# Altium PCB CanTho.PcbDoc
Units mil, origin at the board's own origin, x right, y up, seen from the top; angles counter-clockwise.
Board outline 2000 x 1439 mil, 2 copper layers (Top Layer, Bottom Layer); 60 components, 46 nets, 263 pads, 69 vias.
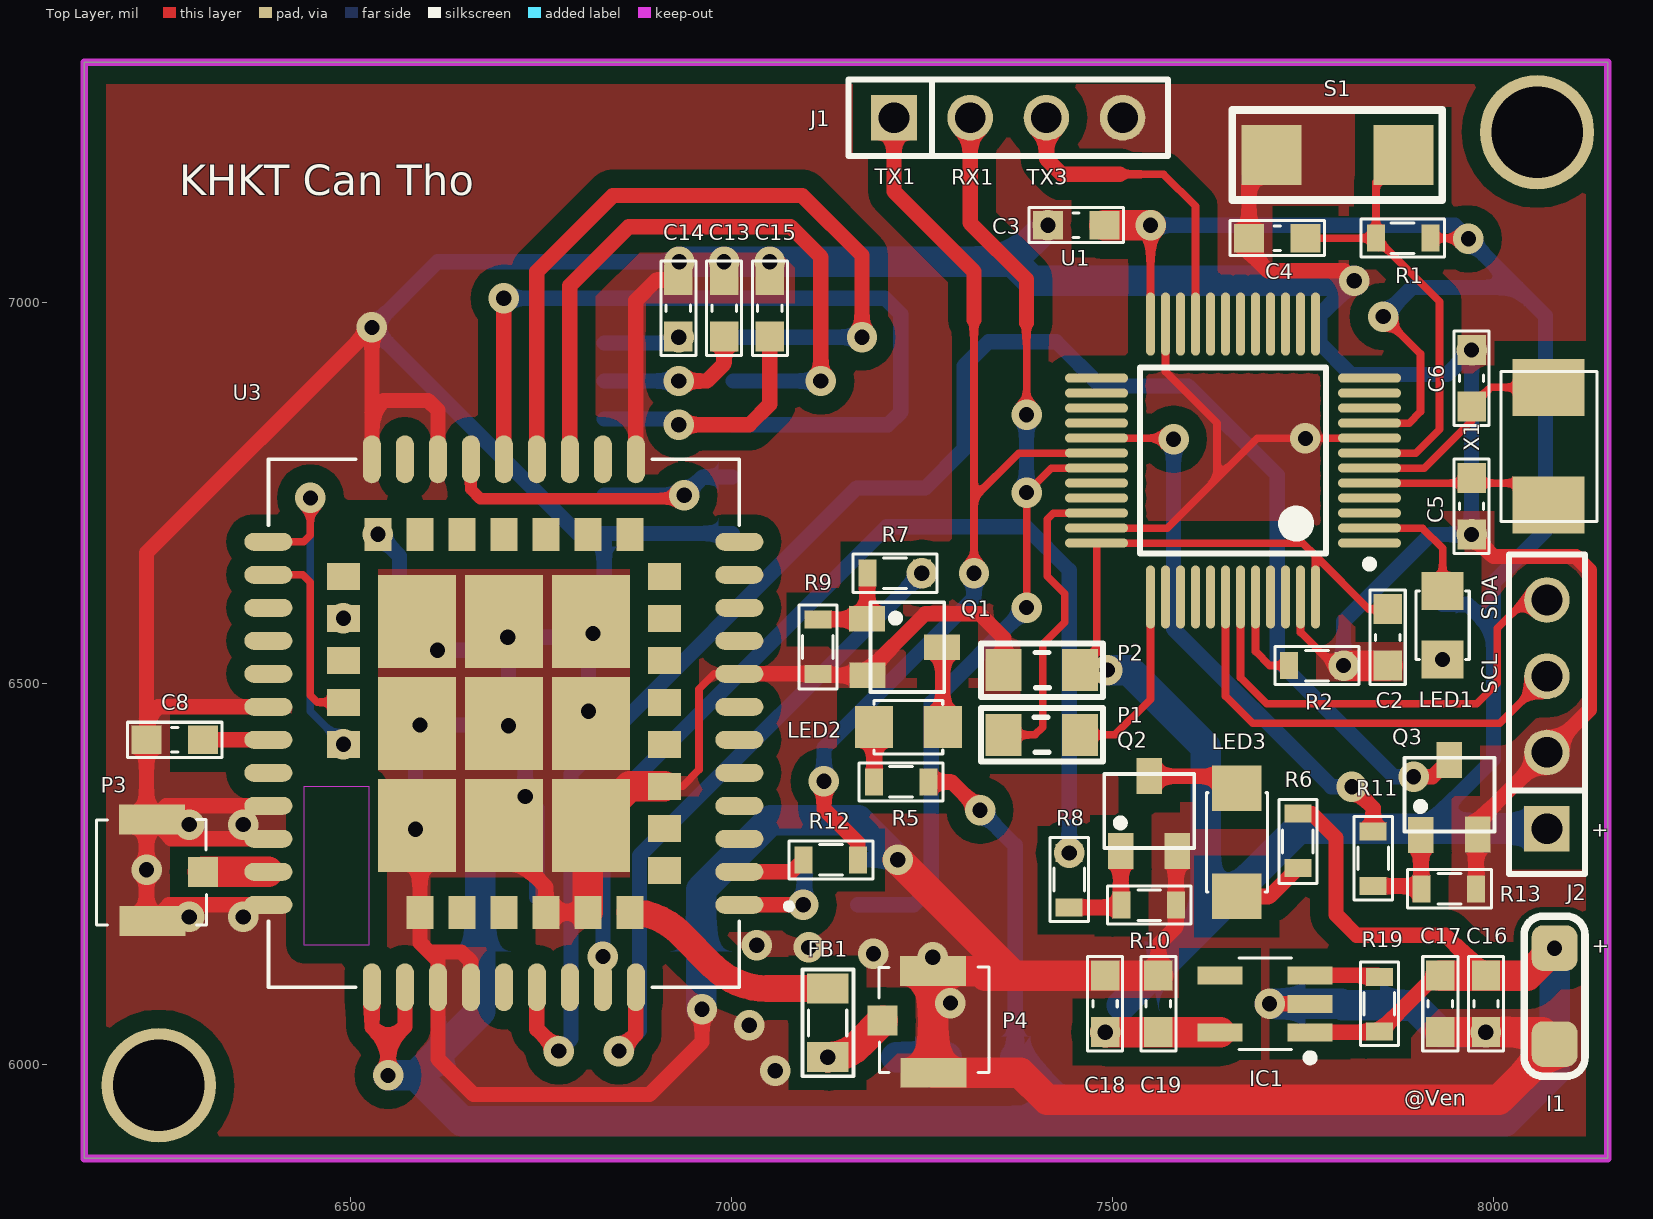
[diagram p0: Top Layer view]
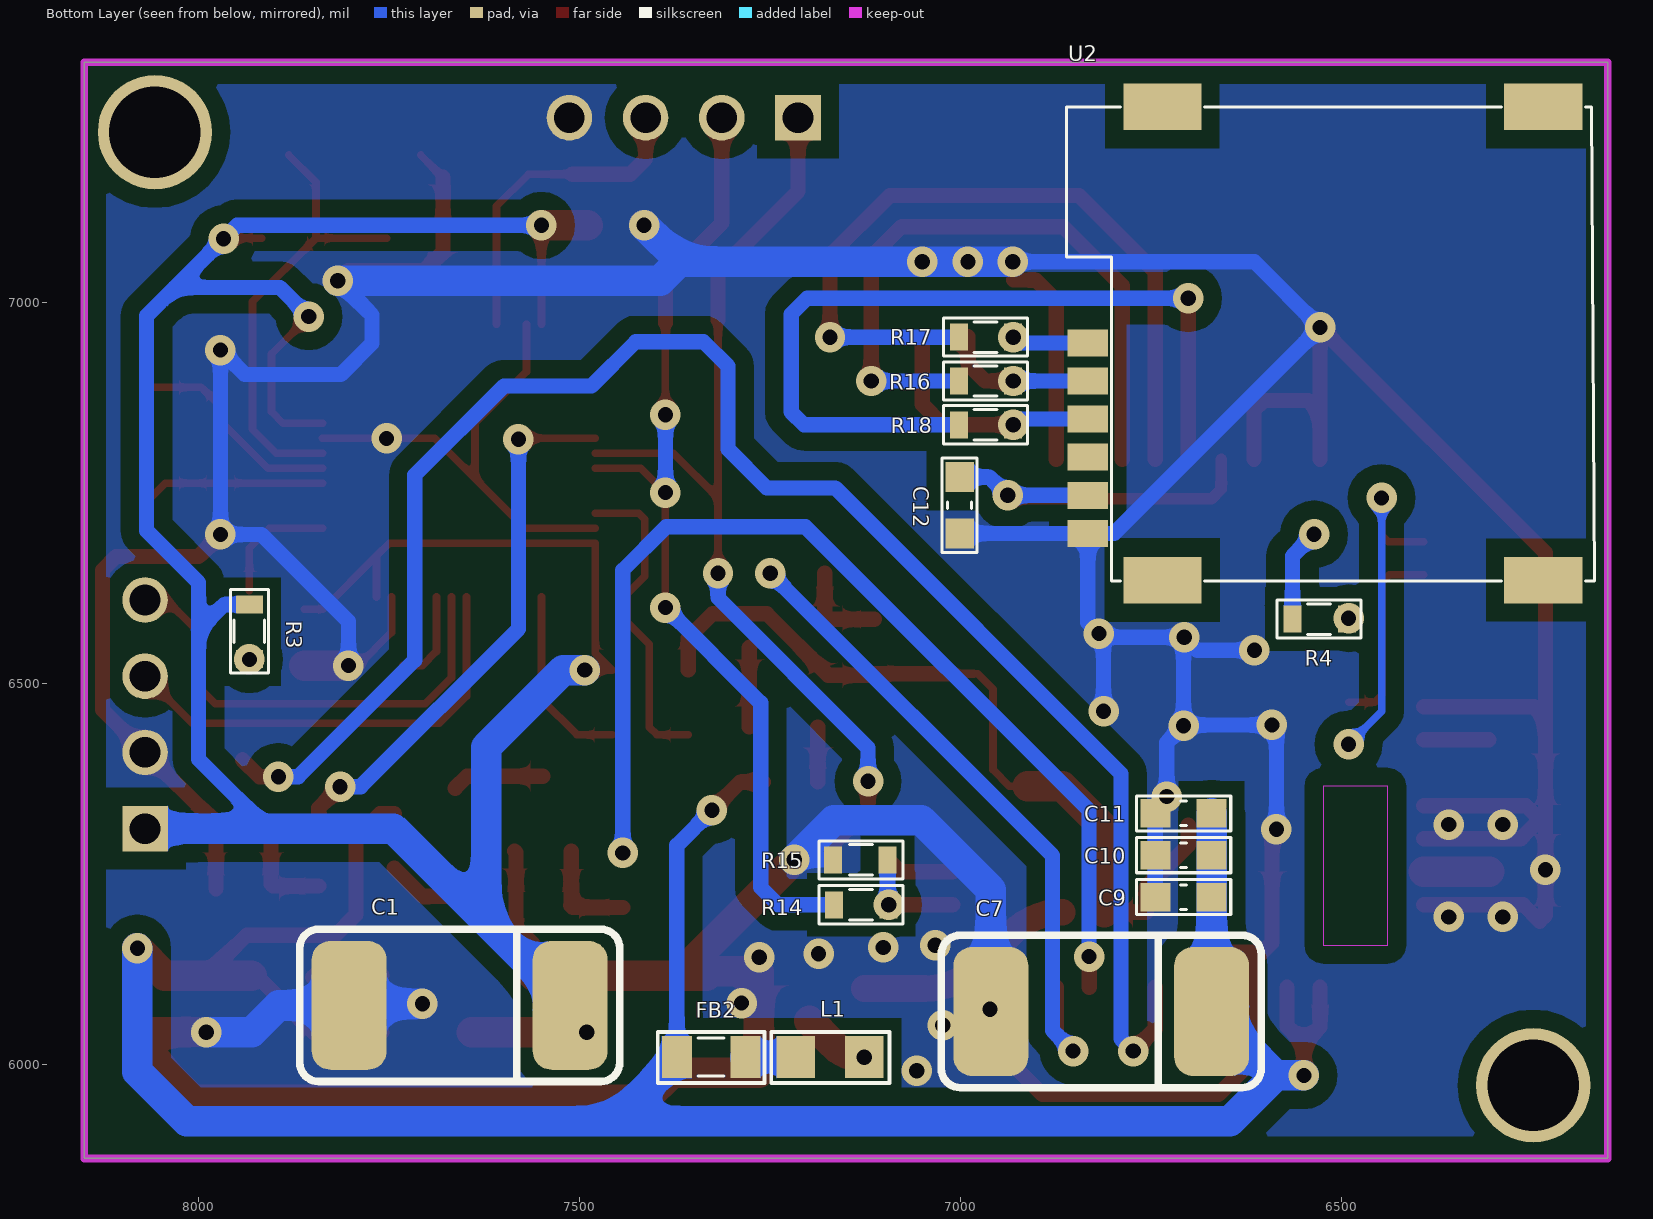
[diagram p1: Bottom Layer view, seen from below]
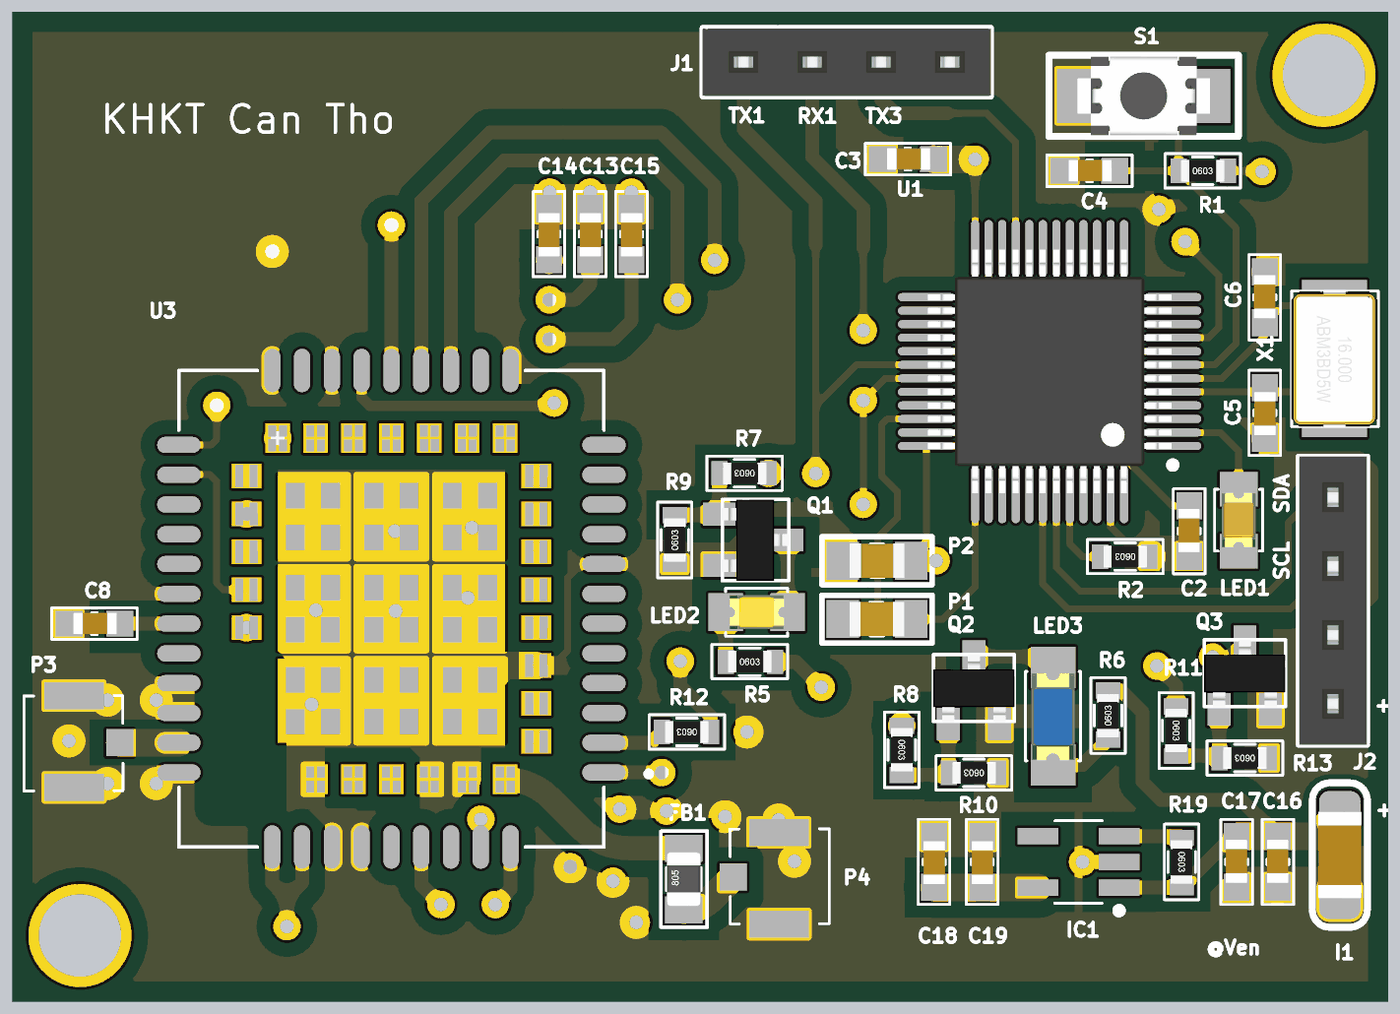
[diagram p2: 3D render of the assembled board from above, using the file's embedded part models]
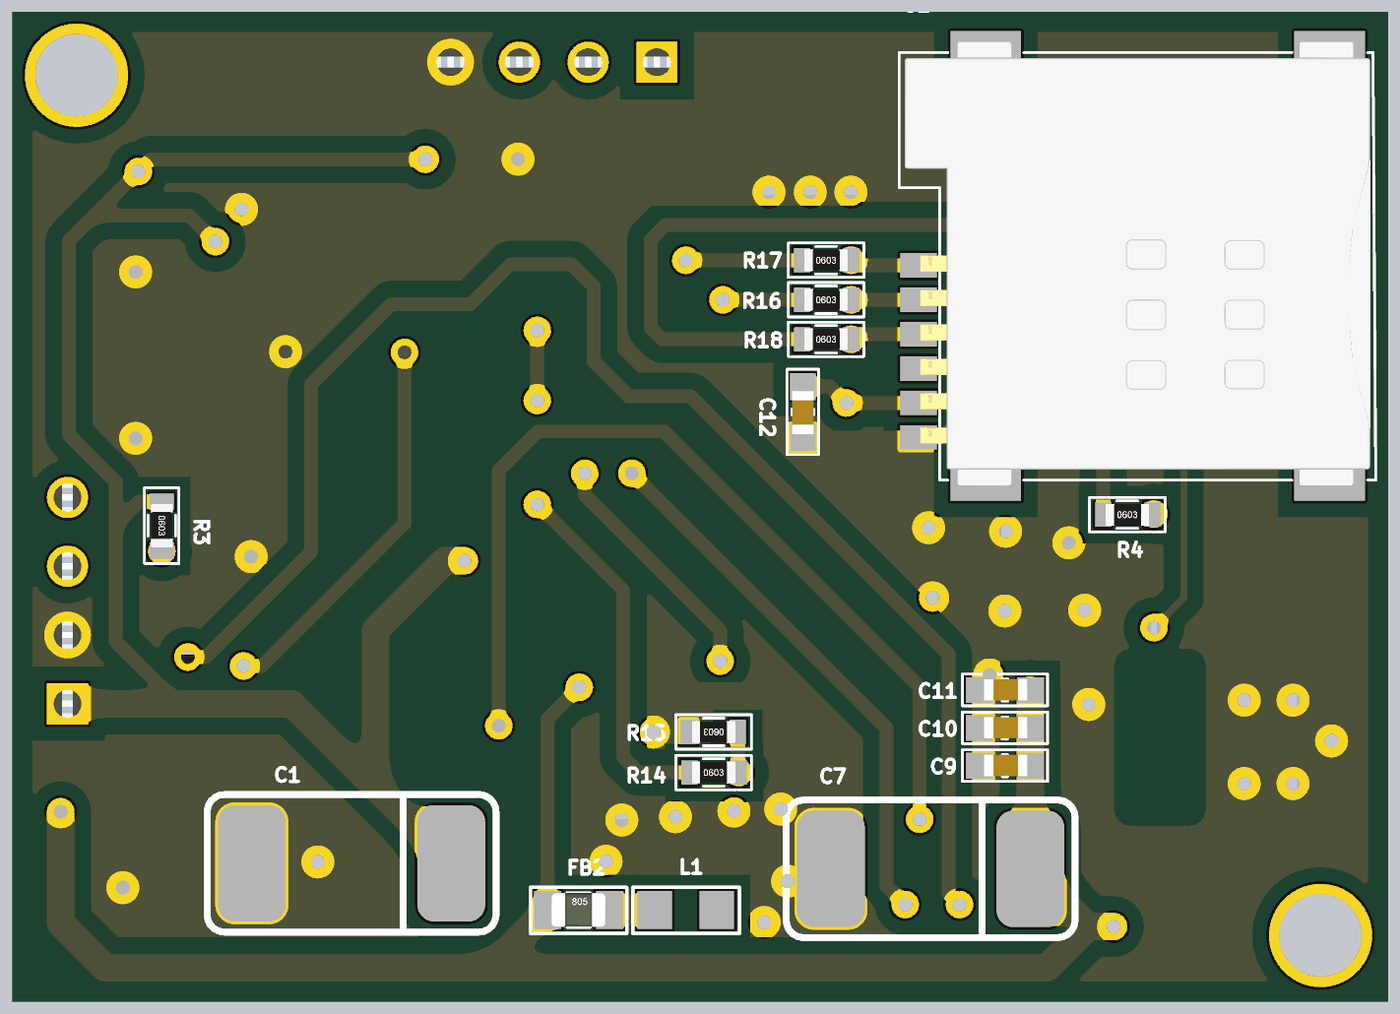
[diagram p3: 3D render of the assembled board from below, using the file's embedded part models]

## Layer stack, top to bottom
Top Solder: solder mask 0.4, Solder Resist, Dk 3.5
Top Layer: signal copper 1.4
Dielectric 1: dielectric 12.6, FR-4, Dk 4.8
Bottom Layer: signal copper 1.4
Bottom Solder: solder mask 0.4, Solder Resist, Dk 3.5

## Board outline
6150,5877 8150,5877 8150,7316 6150,7316

## Design rules (kind name [scope] priority, off if disabled: settings)
Clearance [All] p1: gap=24 ignorepadtopadclearanceinfootprint=TRUE except(0: Arc-Text Arc-Hole Track-Text Track-Hole SMDPad-Text SMDPad-Hole THPad-Text THPad-Hole Via-Text Via-Hole Fill-Text Fill-Hole Poly-Text Poly-Hole Region-Text Region-Hole Text-Text Text-Hole; 8: Arc-Arc Arc-Track Arc-SMDPad Track-Track Track-SMDPad; 10: Arc-THPad Arc-Via Track-THPad Track-Via SMDPad-SMDPad SMDPad-THPad SMDPad-Via THPad-THPad THPad-Via Via-Via)
PolygonConnect [All] p1: connectstyle=Direct reliefconductorwidth=10 reliefentries=4 polygonreliefangle="90 Angle" airgapwidth=10
RoutingVias [All] p1: holewidth=20 width=40 viastyle="Through Hole" minholewidth=15 minwidth=20 maxholewidth=25 maxwidth=40
SolderMaskExpansion [All] p1: expansion=4
Width [All] p1: maxlimit=40 minlimit=10 preferedwidth=20
30 further rules are at their usual default settings.

## Classes and differential pairs
component class "U_[04] - Power": C16 C17 C18 C19 I1 IC1 R19
component class "U_[03] - SENSORs": J2
component class "U_[02] - SIM": C7 C8 C9 C10 C11 C12 C13 C14 C15 FB1 FB2 L1 LED2 LED3 P3 P4 Q1 Q2 Q3 R4 R5 R6 R7 R8 R9 R10 R11 R12 R13 R14 R15 R16 R17 R18 U2 U3
component class "U_[01] - MCU": C1 C2 C3 C4 C5 C6 J2 LED1 P1 P2 R1 R2 R3 S1 U1 X1

## Components (designator, comment, footprint, x,y, rotation, side; value= is the part's Value field where it differs from the comment)
C1 "100uF" CAP_7343 7662,6078 r0 bottom
C2 "10uF" CAP_0603 7861,6561 r90 top value=33p
C3 "100nF" CAP_0603 7452,7102 r0 top value=33p
C4 "10uF" CAP_0603 7716,7085 r0 top value=33p
C5 "33pF" CAP_0603 7971,6733 r270 top value=33p
C6 "33pF" CAP_0603 7971,6901 r90 top value=33p
C7 "100uF" CAP_7343 6820,6070 r0 bottom
C8 "10uF" CAP_0603 6269,6426.54 r0 top value=33p
C9 "10uF" CAP_0603 6707,6220 r180 bottom value=33p
C10 "100nF" CAP_0603 6707,6275 r180 bottom value=33p
C11 "33pF" CAP_0603 6707,6330 r180 bottom value=33p
C12 "100nF" CAP_0603 7001,6734.44 r270 bottom value=33p
C13 "33pF" CAP_0603 6990,6993 r270 top value=33p
C14 "33pF" CAP_0603 6930,6993 r270 top value=33p
C15 "33pF" CAP_0603 7050,6993 r270 top value=33p
C16 "10uF" CAP_0603 7990,6080 r90 top value=33p
C17 "100nF" CAP_0603 7930,6080 r90 top value=33p
C18 "10uF" CAP_0603 7490,6080 r270 top value=33p
C19 "100nF" CAP_0603 7560,6080 r270 top value=33p
FB1 "0R" RES-SMD-0805 7126,6055 r90 top
FB2 "10R" RES-SMD-0805 7327,6010 r180 bottom
I1 "Batt" CAP_3216 8080,6090 r90 top value=33p
IC1 "RT9013" SOT23-5 7700,6080 r180 top
J1 "JP4" JP4-C1T 7213,7243 r0 top
J2 "JP4" JP4-C1T 8070,6310 r90 top
L1 "10uH/0R" L-0805 7171,6010 r180 bottom value="150 mH"
LED1 "LED" LED-0805-Orange 7933,6532 r90 top value="LED 3 ly Single Colour"
LED2 "LED" LED-0805-Yellow 7187,6443.15 r0 top value="LED 3 ly Single Colour"
LED3 "LED" LED-1206-Blue 7663,6221 r90 top value="LED 3 ly Single Colour"
P1 "0" CAP_0805 7407,6432 r180 top value=33p
P2 "0" CAP_0805 7407,6519 r0 top value=33p
P3 "Antenna" IPXS 6289.66,6253.7 r0 top
P4 "Antenna" IPXS 7214.34,6057.61 r180 top
Q1 "2SC1815" SOT23D 7227,6548.15 r270 top value=C1815
Q2 "2SC1815" SOT23D 7548,6329.49 r0 top value=C1815
Q3 "2SC1815" SOT23D 7942,6351 r0 top value=C1815
R1 "10k" RES-SMD-0603 7880.63,7085 r0 top
R2 "10k" RES-SMD-0603 7768,6524 r180 top
R3 "1k" RES-SMD-0603 7933,6569 r270 bottom
R4 "10k" RES-SMD-0603 6529,6585 r180 bottom
R5 "1k" RES-SMD-0603 7222,6371.15 r0 top
R6 "1k" RES-SMD-0603 7743,6293 r90 top
R7 "4.7k" RES-SMD-0603 7214.49,6645.16 r180 top
R8 "4.7k" RES-SMD-0603 7443,6243 r270 top
R9 "47k" RES-SMD-0603 7113,6548.15 r90 top
R10 "47k" RES-SMD-0603 7548,6209.49 r180 top
R11 "4.7k" RES-SMD-0603 7842,6271 r270 top
R12 "1k" RES-SMD-0603 7130.49,6269 r180 top
R13 "47k" RES-SMD-0603 7942,6231 r180 top
R14 "1k" RES-SMD-0603 7130.49,6210 r180 bottom
R15 "5.6k" RES-SMD-0603 7130.49,6269 r0 bottom
R16 "22R" RES-SMD-0603 6967,6897.44 r180 bottom
R17 "22R" RES-SMD-0603 6967,6955 r180 bottom
R18 "22R" RES-SMD-0603 6967,6840 r180 bottom
R19 "100k" RES-SMD-0603 7850,6080 r270 top
S1 "SW-SMD" "SW 3x2x4" 7794.8,7194 r0 top
U1 "STM32" "LQFP 48" 7658,6793 r180 top
U2 "SIM-KF016" "Sim Socket" 6530,6950 r90 bottom value="Sim holder"
U3 "SIM868" SIM868 6700.94,6449.19 r180 top
X1 "8Mhz" "XTAL 5032 SMD" 8072,6811 r270 top value=4Mhz

## Footprints (in the part's own frame and the unit in brackets; to place one, negate y for a bottom-side part, rotate by r counter-clockwise, add the part's x,y. Pads: shape width x height; smd on the part's side, far side on the other; paste and mask are expansions set on the pad)
CAP_0603 [mm]
  rect 1x0.95 smd mask+0.076: 1(-0.94,0) 2(0.94,0)
  silkscreen extent -1.57,-0.58 1.57,0.58, body extent -0.77,-0.39 0.83,0.41, height 0.9
CAP_0805 [mm]
  rect 1.2x1.4 smd: 1(-1.27,-0.025) 2(1.27,-0.025)
  silkscreen extent -2.03,-0.91 2.03,0.86, body extent -1.01,-0.66 1.01,0.61, height 0.61
CAP_3216 [mil]
  rrect50% 60x60 smd: 1(-62.99,0) 2(62.99,0)
  silkscreen extent -105,-40 105,40, body extent -63,-31 63,31, height 39
CAP_7343 [mm] "Capacitor Tantalum 7343"
  rrect50% 2.5x4.3 smd: 1(-3.81,0) 2(3.556,0)
  silkscreen extent -5.46,-2.54 5.21,2.54, body extent -3.81,-2.29 3.56,2.29, height 3
IPXS [mm] "SOT 23 _ 1-3-2"
  rect 1x1 smd: 1(0.415,-0.01)
  rect 2.2x1 smd: 2(-1.273,-1.658) 3(-1.278,1.73)
  silkscreen extent -3.13,-1.79 0.53,1.73, body extent -2.83,-1.49 0.31,1.56, height 1.55
JP4-C1T [mm] "4 row, straight, gold plating"
  rect 1.52x1.52 hole 1.02: 1(0,0)
  round 1.52 hole 1.02: 2(2.54,0) 3(5.08,0) 4(7.62,0)
  silkscreen extent -1.52,-1.27 9.14,1.27, body extent -1.52,-1.25 9.14,1.25, height 8.51
L-0805 [mil] "Compoment SMD 80x50mil"
  rect 50x55 smd: 1(-45,0) 2(45,0)
  silkscreen extent -77,-34 78,33, body extent -50,-20 50,20, height 43
LED-0805-Orange [mil]
  rect 50x55 smd: 1(0,0) 2(90,0)
  silkscreen extent 0,-35 90,35, body extent 5,-25 85,25, height 43
LED-0805-Yellow [mil]
  rect 50x55 smd: 1(0,0) 2(90,0)
  silkscreen extent 0,-35 90,35, body extent 5,-25 85,25, height 43
LED-1206-Blue [mil] "Compoment SMD 120x60mil"
  rect 60x65 smd: 1(0,0) 2(142,0)
  silkscreen extent 6,-40 136,40, body extent 7,-31 133,32, height 43
"LQFP 48" [mm] "LQFP, 48-Leads, Body 7,00x7,00mm, Pitch 0,50mm, IPC Medium Density"
  oval 2.1x0.3 smd: 1(-4.55,2.75) 2(-4.55,2.25) 3(-4.55,1.75) 4(-4.55,1.25) 5(-4.55,0.75) 6(-4.55,0.25) 7(-4.55,-0.25) 8(-4.55,-0.75) 9(-4.55,-1.25) 10(-4.55,-1.75) 11(-4.55,-2.25) 12(-4.55,-2.75) 25(4.55,-2.75) 26(4.55,-2.25) 27(4.55,-1.75) 28(4.55,-1.25) 29(4.55,-0.75) 30(4.55,-0.25) 31(4.55,0.25) 32(4.55,0.75) 33(4.55,1.25) 34(4.55,1.75) 35(4.55,2.25) 36(4.55,2.75)
  oval 0.3x2.1 smd: 13(-2.75,-4.55) 14(-2.25,-4.55) 15(-1.75,-4.55) 16(-1.25,-4.55) 17(-0.75,-4.55) 18(-0.25,-4.55) 19(0.25,-4.55) 20(0.75,-4.55) 21(1.25,-4.55) 22(1.75,-4.55) 23(2.25,-4.55) 24(2.75,-4.55) 37(2.75,4.55) 38(2.25,4.55) 39(1.75,4.55) 40(1.25,4.55) 41(0.75,4.55) 42(0.25,4.55) 43(-0.25,4.55) 44(-0.75,4.55) 45(-1.25,4.55) 46(-1.75,4.55) 47(-2.25,4.55) 48(-2.75,4.55)
  silkscreen extent -4.68,-3.1 3.1,3.57, body extent -4.5,-4.5 4.5,4.5, height 1.6
RES-SMD-0603 [mm]
  rect 0.6x0.9 smd: 1(-0.889,0) 2(0.927,0)
  silkscreen extent -1.4,-0.64 1.4,0.64, body extent -0.8,-0.4 0.8,0.4, height 0.43
RES-SMD-0805 [mil]
  rect 39.37x55 smd: 1(-45,0) 2(45,0)
  silkscreen extent -70,-34 70,33, body extent -39,-25 39,25, height 31
SIM868 [mm] "SIM868 SIMCOM"
  oval 1.6x0.6 smd: 1(-7.85,6.075) 2(-7.85,4.975) 3(-7.85,3.875) 4(-7.85,2.775) 5(-7.85,1.675) 6(-7.85,0.575) 7(-7.85,-0.525) 8(-7.85,-1.625) 9(-7.85,-2.725) 10(-7.85,-3.825) 11(-7.85,-4.925) 12(-7.85,-6.025) 22(7.85,-6.025) 23(7.85,-4.925) 24(7.85,-3.825) 25(7.85,-2.725) 26(7.85,-1.625) 27(7.85,-0.525) 28(7.85,0.575) 29(7.85,1.675) 30(7.85,2.775) 31(7.85,3.875) 32(7.85,4.975) 33(7.85,6.075)
  oval 0.6x1.6 smd: 13(-4.4,-8.775) 14(-3.3,-8.775) 15(-2.2,-8.775) 16(-1.1,-8.775) 17(0,-8.775) 18(1.1,-8.775) 19(2.2,-8.775) 20(3.3,-8.775) 21(4.4,-8.775) 34(4.4,8.825) 35(3.3,8.825) 36(2.2,8.825) 37(1.1,8.825) 38(0,8.825) 39(-1.1,8.825) 40(-2.2,8.825) 41(-3.3,8.825) 42(-4.4,8.825)
  rect 1.1x0.9 smd paste-2: 43(-5.35,4.925) 44(-5.35,3.525) 45(-5.35,2.125) 46(-5.35,0.725) 47(-5.35,-0.675) 48(-5.35,-2.075) 49(-5.35,-3.475) 50(-5.35,-4.875) 58(5.35,-4.875) 59(5.35,-3.475) 60(5.35,-2.075) 61(5.35,-0.675) 62(5.35,0.725)
  rect 0.9x1.1 smd paste-2: 51(-4.2,-6.275) 52(-2.8,-6.275) 53(-1.4,-6.275) 54(0,-6.275) 55(1.4,-6.275) 56(2.8,-6.275) 57(4.2,-6.275) 63(2.8,6.325) 64(1.4,6.325) 65(0,6.325) 66(-1.4,6.325) 67(-2.8,6.325) 68(-4.2,6.325)
  rect 2.6x3.1 smd paste-3: 69(-2.9,3.425) 70(-2.9,0.025) 71(-2.9,-3.375) 72(0,-3.375) 73(2.9,-3.375) 74(2.9,0.025) 75(2.9,3.425) 76(0,3.425) 77(0,0.025)
  Keep-Out Layer region: 6.65,2.129 4.508,2.129 4.508,7.425 6.65,7.425
  Keep-Out Layer region: 6.65,2.127 4.504,2.127 4.504,7.425 6.65,7.425
  Keep-Out Layer region: 6.65,2.126 4.502,2.126 4.502,7.425 6.65,7.425
  silkscreen extent -9.6,-8.77 7.85,8.83
"Sim Socket" [mm] "Socket Micro Sim 6P Push"
  rect 0.9x1.35 smd: 1(-5.145,7.685) 2(-2.605,7.685) 3(-0.065,7.685) 5(-6.415,7.685) 6(-3.875,7.685) 7(-1.335,7.685)
  rect 1.56x2.61 smd: ""(-7.975,-7.5) ""(-7.975,5.2) ""(7.805,-7.5) ""(7.805,5.2)
  silkscreen extent -8,-9.2 7.8,8.4, body extent -8.2,-9 8.2,8.2, height 1.35
SOT23-5 [mm] "SOT23, 5-Leads, Body 3.0x3.0mm (max), Pitch 0.95mm, IPC Medium Density"
  rect 1.5x0.6 smd: 1(-1.5,0.95) 2(-1.5,0) 3(-1.5,-0.95) 4(1.5,-0.95) 5(1.5,0.95)
  silkscreen extent -1.63,-1.52 0.87,1.92, body extent -1.75,-1.52 1.75,1.53, height 1.45
SOT23D [mm] "SOT 23C - 1-3-2 - BCE"
  rect 0.85x1.2 smd: 1(-0.95,-1.25) 2(0.94,-1.245) 3(0,1.25)
  silkscreen extent -1.5,-1.14 1.5,1.32, body extent -1.5,-1.17 1.5,1.33, height 1.06
"SW 3x2x4" [mm]
  rect 2x2 smd: 1(-2.2,0) 2(2.2,0)
  silkscreen extent -3.5,-1.5 3.5,1.5, body extent -2.45,-1.45 2.45,1.45, height 2
"XTAL 5032 SMD" [mm] "SMD 5032 XTAL Footprint"
  rect 1.9x2.4 smd: 1(-1.981,0) 2(1.93,0)
  silkscreen extent -2.51,-1.57 2.49,1.63, body extent -2.5,-1.6 2.5,1.6, height 1.31

## Part data
C1 C7: library part "Cap Pol", "Tantalum", LatestRevisionDate=17-Jul-2002, LatestRevisionNote="Re-released for DXP Platform.", PackageReference=POLAR0.8, Published=8-Jun-2000, Publisher="Altium Limited"
C2 C3 C4 C5 C6 C8 C9 C10 C11 C12 C13 C14 C15 C16 C17 C18 C19: library part CapSMD, "Capacitor", LatestRevisionDate=17-Jul-2002, LatestRevisionNote="Re-released for DXP Platform.", PackageReference=RAD-0.3, Published=8-Jun-2000, Publisher="Altium Limited"
FB1 FB2: library part "Resistor - SMD", "Ferrit Bead", Manufacturer="Generic Components", Class=Passive, Published=08/06/2000, Publisher="Altium Hobart Technology Centre"
I1 P1 P2: library part CapSMD, "Pad", LatestRevisionDate=17-Jul-2002, LatestRevisionNote="Re-released for DXP Platform.", PackageReference=RAD-0.3, Published=8-Jun-2000, Publisher="Altium Limited"
IC1: "RT9013-33GB IC REG LINEAR 3.3V 500mA SOT23-5"
J1 J2: "WR-PHD 2.54 mm Angled Socket Header", Manufacturer="Würth Elektronik eiSos GmbH", partNo=613004143121, ComponentLink1 Description=Manufacturer, ComponentLink1URL=http://www.we-online.com, ComponentLink2 Description=Datasheet, ComponentLink2URL=http://katalog.we-online.de/em/datasheet/6130xx143121.pdf, Created by="Karrer Zheng", Created Date="29 March 2013", NoPins=04
L1: library part Inductor, "Inductor"
LED1 LED2 LED3: "LED Single colour Green and Red"
P3 P4: library part IPXSx66, "Antenna GSM GPS"
Q1 Q2 Q3: "NPN 600mW, ECB", =C2383
R1 R2 R3 R4 R5 R6 R7 R8 R9 R10 R11 R12 R13 R14 R15 R16 R17 R18 R19: library part "Resistor - SMD", "Resistor", Manufacturer="Generic Components", Class=Passive, Published=08/06/2000, Publisher="Altium Hobart Technology Centre"
S1: "Switch", LatestRevisionDate=17-Jul-2002, LatestRevisionNote="Re-released for DXP Platform.", PackageReference=SPST-2, Published=24-Mar-1999, Publisher="Altium Limited"
U1: library part STM32F103C8T6, "STM32 ARM-based 32-bit MCU with 64 Kbytes Flash, 64-pin LQFP, Industrial Temperature"
U2: library part "Sim holder", "SIM Card Holder KF-016"
U3: "SIM868 SIMCOM"
X1: library part XT2, "Crystal For all Crystal 2pin."

## Free pads (board coordinates)
  round 150 hole 120: 0(6248,5973) 0(8057,7224)

## Via types
v1: diameter 40, hole 20, Top Layer to Bottom Layer, 69 vias

## Nets (pads, with @x,y where several pads share a name; then routed paths per layer and width w, separated by ;. In a path a pad name is that pad's centre, name@x,y a point inside that pad or via, vN(x,y) a via of type N, cw(c..) or ccw(c..) an arc to the next point about the centre after c; other vN are vias at no path point)
3V3: C1.1 C2.2 C3.2 C18.2 C19.2 IC1.5 J2.1 P2.2 R1.2 R3.1 U1.9 U1.24 U1.36 U1.48 | length 3926.9
  Top Layer w10: v1(7493,6518) P2.2 7478.87,6539.87 U1.36 7749.27,6684.73 7766.27,6667.73 ; U1.24 v1(7549.73,7101.73) ; U1.48 7766.27,6667.73 ; U1.9 7889.21,6842.21 7904,6857 7904,6933 v1(7855,6982) ; C2.2 7836,6598 7766.27,6667.73 ; R1.2 7966,7085 v1(7967,7084)
  Top Layer w40: C3.2 7489.27,7101.73 v1(7549.73,7101.73) ; C18.2 v1(7490.4,6042.6) IC1.5
  Bottom Layer w20: v1(7549.73,7101.73) 7949.27,7101.73 v1(7967,7084) 8031,7020 ; v1(7855,6982) 7893,7020 8031,7020 ; 7909,6310 8000,6401 8000,6570 ; R3.1 7966,6604 8000,6570 ; 8000,6570 8000,6633 8068,6701 8068,6983 8031,7020
  Bottom Layer w40: v1(7493,6518) 7521,6518 7622,6417 7622,6188 ; C1.1 7622,6188 ; J2.1 7909,6310 7744,6310 7622,6188
GND: C1.2 C2.1 C3.1 C4.1 C5.2 C6.2 C7.2 C8.1 C9.1 C10.1 C11.1 C12.2 C13.1 C14.1 C15.1 C16.1 C17.1 C18.1 C19.1 I1.1 IC1.2 J1.4 J2.2 P2.1 P3.2 P3.3 P4.2 P4.3 Q1.2 Q2.2 Q3.2 R2.1 R9.1 R10.1 R13.1 R15.2 S1.1 U1.8 U1.23 U1.35 U1.47 U2.5 U3.8 U3.13 U3.19 U3.21 U3.27 U3.30 U3.31 U3.33 U3.36 U3.37 U3.45 U3.63 U3.66 U3.67 U3.69 U3.70 U3.71 U3.72 U3.73 U3.74 U3.75 U3.76 U3.77 | length 12481.4
  Top Layer w10: U3.45 6935.51,6365.51 6957,6387 6957,6493 6977.15,6513.15 U3.8 ; U1.35 7571.42,6704.42 7637,6770 ; U1.23 7569.42,6909.67 7637,6842.09 7637,6770 ; S1.1@7679,7164.82 S1.1 ; U1.47 7746.58,6567.42 7790,6524 v1(7803,6524) ; U1.8 7689.53,6822.53 7637,6770
  Top Layer w20: U3.33 6261.12,6210 P3.2 6232,6195.97 v1(6232,6256) P3.3@6232,6329.14 ; U3.31 6264.52,6296.61 P3.3 ; U3.30 6257.48,6339.92 P3.3 ; U3.27 6246.84,6469.84 6232,6455 ; U3.21 6527.72,6856.72 ; U3.75 6590.71,6310.39 U3.63 6590.71,6160.29 6603,6148 ; U3.19 6614.33,6859 6601.33,6872 6543,6872 6527.72,6856.72 ; U3.37 6657.64,6135.36 6645,6148 6603,6148 ; U3.76 6700.94,6288.06 6756.06,6232.94 U3.66 U3.67 ; U3.13 6874.17,7003.17 6901,7030 C14.1 ; v1(6961,6073) 6961,6029.97 6892.03,5961 6661,5961 6614.33,6007.67 U3.36 6614.33,6136.67 6603,6148 ; U3.8 R9.1 7115,6511.15 7173.15,6511.15 7254,6592 7324.98,6592 7357,6559.98 P2.1 ; C19.1 7560,6158 7583,6181 R10.1 7583,6278.49 Q2.2 ; S1.1@7679,7164.82 C4.1 7679,7067 7704,7042 7804,7042 v1(7817,7029) ; v1(7706,6080) IC1.2 ; v1(7971,6696) 8000,6667 8108,6667 8126,6649 8126,6466 J2.2 7979,6319 Q3.2 7977,6300 R13.1 ; P3.3@6232,6329.14 C8.1 6232,6455 ; P3.3@6232,6329.14 P3.3 ; 6232,6455 6232,6672 v1(6527.72,6967.72) 6527.72,6856.72
  Top Layer w40: U3.67 6811.18,6310.39 U3.69 6866.3,6365.51 U3.45 ; v1(7218,6269) 7370,6117 ; C19.1 C18.1 7370,6117 ; v1(7803,6524) C2.1 ; C17.1 C16.1@7989.6,6043 ; C16.1 8064.01,6043 I1.1 8006.99,5954 7414,5954 7378.48,5989.52 P4.3 7264.46,5989.71 P4.2 7327.12,6122.88 7333,6117 7370,6117
  Bottom Layer w20: v1(6585,6309) 6585,6440 v1(6591,6446) 6706,6446 v1(6707,6445) ; v1(6614,6544) 6689,6544 v1(6706,6561) ; C9.1 C10.1 C11.1 6744,6337 v1(6729,6352) 6729,6423 v1(6707,6445) ; v1(6812,6464) 6812,6560 v1@6813,6561 ; v1(6931,7054) 6614,7054 v1(6527.72,6967.72) 6797.99,6697.44 U2.5 ; C12.2 U2.5 ; R15.2 v1(7218,6269) ; v1(7803,6524) 7803,6582 7917,6696 v1(7971,6696) v1(7971,6938) 7939,6906 7813,6906 7772,6947 7772,6984 v1(7817,7029) ; v1(6706,6561) v1@6813,6561 ; v1(6706,6561) 6707,6560 v1(6707,6445) ; v1@6813,6561 v1(6818,6566) 6832.56,6580.56 U2.5
  Bottom Layer w40: v1(6931,7054) v1(6990,7054) v1(7050,7054) 7367,7054 ; C7.2@6960,6073 6960,6230 7051,6321 7166,6321 v1(7218,6269) ; v1(7415,7102) 7367,7054 ; v1(7706,6080) 7800,6080 C1.2 7894.6,6078 7930,6042.6 v1(7989.6,6042.6) ; v1(7817,7029) 7394,7029 7369,7054 7367,7054
  other v1: 7057,5992 7023,6052 7287,6080.93 7264,6141 7186,6145.82 7101,6154 7033,6156.85 6288,6194 6359,6194 6288,6315.26 6359,6315.26 7753,6822
GPS_EN: R4.1 U3.57 | length 123
  Bottom Layer w20: v1(6535.59,6696.22) 6564,6667.81 R4.1
NetC5_1: C5.1 U1.5 X1.2 | length 246.7
  Top Layer w10: U1.5 8043.53,6763.47 X1.2
NetC6_1: C6.1 U1.6 X1.1 | length 289.8
  Top Layer w10: U1.6 7909.16,6783.16 7971,6845 C6.1 7996,6889 X1.1
NetC13_2: C13.2 R16.2 U2.7 | length 202.8
  Top Layer w20: v1(6930.51,6897.45) 6967.45,6897.45 6990,6920 C13.2
  Bottom Layer w20: U2.7 v1(6930.51,6897.45)
NetC14_2: C14.2 R17.2 U2.3 | length 101.1
  Bottom Layer w20: U2.3 6922.95,6947.44 v1(6930.51,6955)
NetC15_2: C15.2 R18.2 U2.2 | length 320.7
  Top Layer w20: v1(6930.51,6840) 7023,6840 7050,6867 C15.2
  Bottom Layer w20: U2.2 6923.08,6847.44 v1(6930.51,6840)
NetFB1_1: FB1.1 L1.2 P4.1 | length 89.4
  Top Layer w40: v1(7126,6010) ccw(c7126,6067.94) 7166.97,6026.97 P4.1
NetFB1_2: FB1.2 U3.68 | length 292.9
  Top Layer w35: U3.68 cw(c6866.3,6107.1) 6932.1,6172.9 6975.72,6129.29 ccw(c7046.43,6200) 7046.43,6100 FB1.2
NetFB2_2: FB2.2 L1.1 | length 66
  Bottom Layer w40: L1.1 FB2.2
NetIC1_3: IC1.3 R19.1 | length 91.9
  Top Layer w20: IC1.3 7847.6,6117.4 R19.1
NetJ2_3: J2.3 U1.42 | length 592.4
  Top Layer w10: U1.42 7648.16,6483.84 7684,6448 8008,6448 J2.3
NetJ2_4: J2.4 U1.43 | length 620.5
  Top Layer w10: U1.43 7667.84,6508.16 7702,6474 7978,6474 8005,6501 8005,6573 8042,6610 J2.4
NetLED1_1: LED1.1 R3.2
  other v1: 7933,6532
NetLED1_2: LED1.2 U1.2 | length 162.8
  Top Layer w10: U1.2 7906.58,6704.42 7933,6678 LED1.2
NetLED2_1: LED2.1 R5.1 | length 72
  Top Layer w20: R5.1 LED2.1
NetLED2_2: LED2.2 Q1.3 | length 105.3
  Top Layer w20: Q1.3 7277,6547.37 LED2.2
NetLED3_1: LED3.1 R6.1 | length 95.3
  Top Layer w20: LED3.1 7706,6221 R6.1
NetLED3_2: LED3.2 Q2.3 | length 121.5
  Top Layer w20: Q2.3 7647.3,6378.7 LED3.2
NetP3_1: P3.1 U3.32 | length 85.9
  Top Layer w40: P3.1 U3.32
NetQ1_1: Q1.1 R7.2 R9.2 | length 124.9
  Top Layer w20: R9.2 7176.87,6584.64 Q1.1 7178,6585.77 R7.2
NetQ2_1: Q2.1 R8.2 R10.2 | length 140.9
  Top Layer w20: R8.2 7508.54,6206.51 R10.2 7510.59,6210.4 Q2.1
NetQ3_1: Q3.1 R11.2 R13.2 | length 128.3
  Top Layer w20: R11.2 7902,6234.51 7904.6,6237.11 Q3.1
NetR2_2: R2.2 U1.44 | length 123
  Top Layer w10: U1.44 7687.53,6542.47 7706,6524 R2.2
NetR4_2: R4.2 U3.59
  other v1: 6490.31,6585.98
NetR11_1: R11.1 U1.29 | length 741.1
  Top Layer w10: U1.29 7578.47,6822.53 v1(7580,6821)
  Top Layer w20: v1(7814,6365) 7842,6337 R11.1
  Bottom Layer w20: v1(7580,6821) 7580,6572 7787,6365 v1(7814,6365)
NRST: C4.2 R1.1 S1.2 U1.7 | length 606.8
  Top Layer w10: C4.2 R1.1 ; U1.7 7897.84,6802.84 7929,6834 7929,7001.62 R1.1 ; S1.2 7845.62,7158.21 R1.1
RX1: J1.2 R14.1 U1.31 | length 1303.7
  Top Layer w10: v1(7387,6600) v1(7387,6751) 7419.16,6783.16 U1.31 ; v1(7387,6853) 7387,6973.41
  Top Layer w20: J1.2 7313,7105 7387,7031 7387,6973.41
  Bottom Layer w20: R14.1 7239,6210 7262,6233 7262,6475 v1(7387,6600) ; v1(7387,6751) v1(7387,6853)
SIM_NL: R8.1 U3.41 | length 1393
  Top Layer w20: U3.41 6830.87,6141.87 v1(6831,6142)
  Bottom Layer w20: v1(6831,6142) 6831,6334 7203,6706 7386,6706 7443,6649 v1(7443,6278)
SIM_PWRKEY: Q3.3 U3.39 | length 2306
  Top Layer w20: U3.39 6744.25,6046.75 v1(6773,6018) ; v1(7895,6378) 7919.79,6378 Q3.3
  Bottom Layer w20: v1(6773,6018) 6789,6034 6789,6382 7164,6757 7254,6757 7305,6808 7305,6917 7337,6949 7426,6949 7484,6891 7599,6891 7716,6774 7716,6531 7869,6378 v1(7895,6378)
SIM_ST: R7.1 U3.42 | length 884.7
  Top Layer w20: v1(6852,6018) 6874.17,6040.17 U3.42
  Bottom Layer w20: v1(6852,6018) 6879,6045 6879,6274.67 v1(7249.49,6645.16)
SIM_UART_RX1: R12.2 U3.2 | length 90.5
  Top Layer w20: U3.2 7078.31,6253.31 R12.2
SIM_UART_RX2: U3.23 U3.61 | length 254.4
  Top Layer w10: U3.23 6436.93,6643.07 6447,6633 6447,6485 6456.25,6475.75 U3.61
SIM_UART_TX1: R14.2 R15.1 U3.1 | length 143.4
  Top Layer w20: U3.1 v1(7094,6210)
  Bottom Layer w20: v1(7094,6210) ccw(c7090.4,6213.6) 7095.49,6213.6 R15.1
SIM_UART_TX2: U3.22 U3.62 | length 449
  Top Layer w10: U3.22 6438.38,6686.38 6447,6695 v1(6447,6744)
  Bottom Layer w10: v1(6447,6744) 6447,6463.94 v1(6490.31,6420.63)
SIMC_CLK: R17.1 U3.16 | length 1023.7
  Top Layer w20: U3.16 6744.25,7041.25 6844,7141 7092.52,7141 7171,7062.52 v1(7171,6955)
  Bottom Layer w20: R17.1 v1(7171,6955)
SIMC_IO: R16.1 U3.15 | length 883.6
  Top Layer w20: U3.15 6787.56,7022.56 6865,7100 7077,7100 7117,7060 v1(7117,6897.45)
  Bottom Layer w20: R16.1 v1(7117,6897.45)
SIMC_RST: R18.1 U3.17 | length 1096.1
  Top Layer w20: U3.17 v1(6700.94,7006)
  Bottom Layer w20: v1(6700.94,7006) 7201,7006 7222,6985 7222,6857 7205,6840 R18.1
SIMC_VDD: C12.1 U2.1 U3.18 | length 504.5
  Top Layer w15: U3.18 6657.64,6755.36 6670,6743 6933.12,6743 v1(6937.56,6747.44)
  Bottom Layer w20: U2.1 v1(6937.56,6747.44) 6961.56,6771.44 C12.1
SWCLK: P1.1 U1.37 | length 246.2
  Top Layer w10: P1.1 7503,6433 7549.73,6479.73 U1.37
SWDIO: P1.2 U1.34 | length 417.9
  Top Layer w10: P1.2 7398,6433 7408,6443 7408,6552 7437,6581 7437,6618 7414,6641 7414,6716 7422.1,6724.1 U1.34
TX1: J1.1 R12.1 U1.30 | length 1302.8
  Top Layer w10: v1(7318,6645) 7318,6744 ; 7318,6977.41 7318,6744 ; U1.30 7376.84,6802.84 7318,6744
  Top Layer w20: v1(7121,6372) 7121,6335.79 7165.49,6291.3 R12.1 ; J1.1 7213,7146 7318,7041 7318,6977.41
  Bottom Layer w20: v1(7121,6372) 7121,6416 7318,6613 v1(7318,6645)
TX3: J1.3 U1.21 | length 430.1
  Top Layer w10: 7509.27,7168.73 7566.69,7168.73 7608.79,7126.63 U1.21
  Top Layer w20: J1.3 7413,7189 7433.27,7168.73 7509.27,7168.73
VBAT: C7.1 C9.2 C10.2 C11.2 C16.2 C17.2 FB2.1 I1.2 IC1.1 R5.2 R6.2 R19.2 U3.34 U3.35 | length 3636.6
  Top Layer w20: U3.34 6527.72,6049.28 6549,6028 ; v1(6549,5986) 6549,6028 ; U3.35 6571.02,6050.02 6549,6028 ; R5.2 7288.84,6371.16 v1(7326,6334) ; R6.2 7761.51,6329.49 7793,6298 7793,6197 7820,6170 7937,6170 C16.2 ; IC1.1 7849.09,6042.6 R19.2 7923.49,6117 C17.2
  Top Layer w40: C17.2 C16.2 8044.01,6117 v1(8080,6152.99)
  Bottom Layer w20: v1(7326,6334) 7372,6288 FB2.1
  Bottom Layer w40: v1(6549,5986) 6586,5986 ; C11.2 C7.1 6586,5986 ; FB2.1 7456,5926 ; v1(8080,6152.99) 8080,5991 8015,5926 7456,5926 ; 6586,5986 6646,5926 7456,5926
VRTC: C8.2 U3.28 | length 85.9
  Top Layer w20: C8.2 U3.28
pads on no net: IC1.4 U1.1 U1.3 U1.4 U1.10 U1.11 U1.12 U1.13 U1.14 U1.15 U1.16 U1.17 U1.18 U1.19 U1.20 U1.22 U1.25 U1.26 U1.27 U1.28 U1.32 U1.33 U1.38 U1.39 U1.40 U1.41 U1.45 U1.46 U2. U2.6 U3.3 U3.4 U3.5 U3.6 U3.7 U3.9 U3.10 U3.11 U3.12 U3.14 U3.20 U3.24 U3.25 U3.26 U3.29 U3.38 U3.40 U3.43 U3.44 U3.46 U3.47 U3.48 U3.49 U3.50 U3.51 U3.52 U3.53 U3.54 U3.55 U3.56 U3.58 U3.60 U3.64 U3.65

## Polygon pours and split planes (outlines as drawn)
GND on Bottom Layer "GND_L02_P000" (solid, remove dead copper, pour order 0): 6150,5877 6150,7316 8150,7316 8150,5877
GND on Top Layer "GND_L01_P002" (solid, remove dead copper, pour order 2): 6150,5877 6150,7316 8150,7316 8150,5877

## Keep-outs
Keep-Out Layer:
  the board outline again, w10

## Silkscreen, mask and mechanical layers (free items; w line width, h text height)
Top Overlay:
  text "TX1" at 7188,7156 h20
  text "RX1" at 7288,7155 h20
  text "TX3" at 7387,7155 h20
  text "KHKT Can Tho" at 6275,7141 h40
  text "SDA" at 8005,6584 h20 r90
  text "SCL" at 8005,6487 h20 r90
  text "+" at 8128,6299 h20
  text "+" at 8129,6147 h20
  text "@Ven" at 7883,5946 h20